# EAGLE board Mini Spectrometer Main PCB (EAGLE 9.7.0)
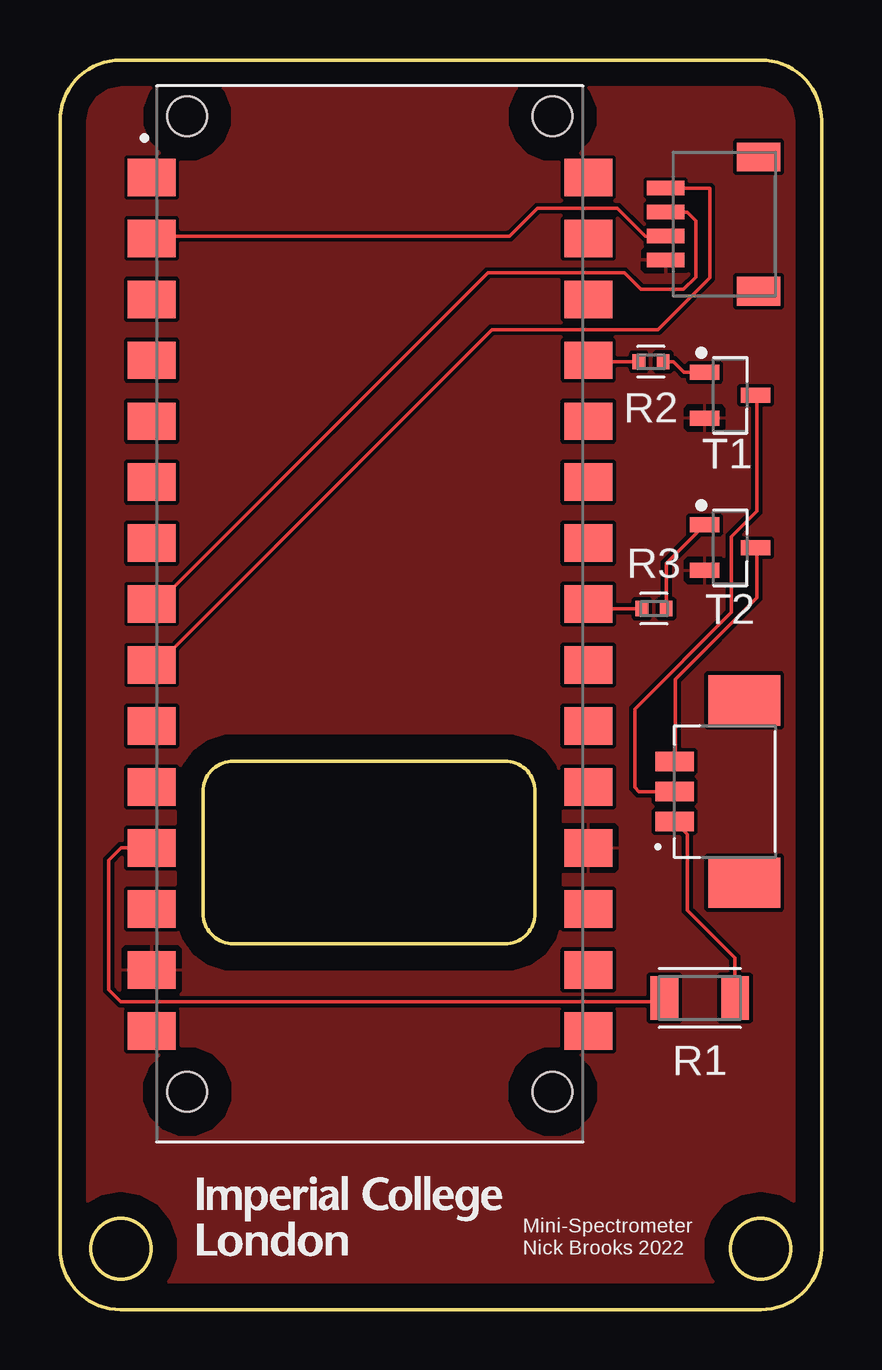
[diagram p0: board, top side]

Size 31.75 x 52.07 mm. Coordinates in mm from the lower left corner, seen from the top.
Outline: 0,2.54 arc90 2.54,0 29.21,0 arc90 31.75,2.54 31.75,49.53 arc90 29.21,52.07 2.54,52.07 arc90 0,49.53 0,2.54
Outline: 7.24,22.86 arc90 5.97,21.59 5.97,16.51 arc90 7.24,15.24 18.54,15.24 arc90 19.81,16.51 19.81,21.59 arc90 18.54,22.86 7.24,22.86
Outline: circle at 2.54,2.54 radius 1.25
Outline: circle at 29.21,2.54 radius 1.25
Copper layers (1*16): Top / Bottom
Stack-up Default Layer Stack: Top User Defined 0.035mm / Dielectric-1 User Defined 1.5mm / Bottom User Defined 0.035mm
Design rules "default": minimum track width 6mil, minimum drill 0.35mm, track to track 6mil, track to pad 6mil, pad to pad 6mil, via to via 6mil, smd to smd 6mil, copper to edge 40mil, drill to drill 6mil, minimum pad ring 10mil, minimum via ring 8mil, stop-mask expansion 4mil, vias tented up to drill 0mil, thermal gap 10mil

## Footprints (pad centres in the part's own frame; a part is rotated, then mirrored left to right if it is on the bottom)
JST_SM04B-SRSS-TB_LF__SN_ = smd 0.6 x 1.55: 1 -1.5,2.45; 2 -0.5,2.45; 3 0.5,2.45; 4 1.5,2.45 | smd 1.2 x 1.8: M -2.8,-1.425; N 2.8,-1.425
MOLEX_53261-0371 = smd 0.8 x 1.6: 1 -1.25,0; 2 0,0; 3 1.25,0 | smd 2.1 x 3: P1 -3.8,-2.9; P2 3.8,-2.9
RESC3216X70 = smd 1.165 x 1.815: 1 -1.475,0; 2 1.475,0
RESC1005X40 = smd 0.535 x 0.644: 1 -0.507,0; 2 0.507,0
SOT95P237X112-3N = smd 1.224 x 0.625: 1 -1.064,0.95; 2 -1.064,-0.95; 3 1.064,0
MODULE_ABX00027 = smd 1.56 x 2: 1 -18.19,-9.1; 2 -15.65,-9.1; 3 -13.11,-9.1; 4 -10.57,-9.1; 5 -8.03,-9.1; 6 -5.49,-9.1; 7 -2.95,-9.1; 8 -0.41,-9.1; 9 2.13,-9.1; 10 4.67,-9.1; 11 7.21,-9.1; 12 9.75,-9.1; 13 12.29,-9.1; 14 14.83,-9.1; 15 17.37,-9.1; 16 17.37,9.1; 17 14.83,9.1; 18 12.29,9.1; 19 9.75,9.1; 20 7.21,9.1; 21 4.67,9.1; 22 2.13,9.1; 23 -0.41,9.1; 24 -2.95,9.1; 25 -5.49,9.1; 26 -8.03,9.1; 27 -10.57,9.1; 28 -13.11,9.1; 29 -15.65,9.1; 30 -18.19,9.1 | hole 1.651: -20.73,-7.62; -20.73,7.62; 19.91,7.62; 19.91,-7.62

## Placement (x,y rotation side)
J1  JST-SH-4WAY-2  [JST_SM04B-SRSS-TB_LF__SN_]  27.7,45.23 90 top
P1  53261-0371  [MOLEX_53261-0371]  25.62,21.59 90 top
R1  100  [RESC3216X70]  26.67,12.99 0 top
R2  1K  [RESC1005X40]  24.64,39.5 0 top
R3  1K  [RESC1005X40]  24.77,29.21 0 top
T1  NPN  [SOT95P237X112-3N]  27.94,38.1 0 top
T2  NPN  [SOT95P237X112-3N]  27.94,31.75 0 top
U1  ABX00027  [MODULE_ABX00027]  12.92,28.99 270 top

## Library data of the parts
J1 = JST-SH-2
P1 = 53261-0371; MANUFACTURER: MOLEX
R1-R3 = Resistor; CATEGORY: Resistor; SUB-CATEGORY: Fixed
T1 T2 = Transistor; CATEGORY: Transistor; SUB-CATEGORY: BJT; TYPE: NPN
U1 = ABX00027; AVAILABILITY: Unavailable; DESCRIPTION: ATSAMD21G18A Arduino Nano 33 IoT SAM D ARM® Cortex®-M0+ MCU 32-Bit Embedded Evaluation Board; DIGIKEY-PURCHASE-URL: https://snapeda.com/shop?store=DigiKey&id=3949339; MF: Arduino; MP: ABX00027; PACKAGE: None; PRICE: None

## Nets
GND: J1.1 T1.2 T2.2 U1.14 U1.19
N$1: R1.1 U1.12
N$2: R2.1 U1.27
N$3: R3.1 U1.23
N$4: R2.2 T1.1
N$5: R3.2 T2.1
N$8: J1.2 U1.2
N$9: J1.3 U1.8
N$10: J1.4 U1.9
N$11: P1.1 R1.2
N$13: P1.2 T1.3
N$14: P1.3 T2.3
VIN: U1.15

## Tracks (layer width: path | path; a pad name or v marks a point on that pad's centre or on a via)
GND
  pour Top: -25.4,55.88 53.34,55.88 53.34,-12.7 -25.4,-12.7
N$1
  Top 0.152: 24.69,13.41 25.09,13.01 R1.1 25.2,12.83 2.54,12.83 2.03,13.34 2.03,18.72 2.55,19.24 U1.12
N$2
  Top 0.152: R2.1 22.07,39.5 22.05,39.52 U1.27
N$3
  Top 0.152: R3.1 22.02,29.21 U1.23
N$4
  Top 0.152: R2.2 25.58,39.5 26.01,39.07 26.77,39.07 T1.1
N$5
  Top 0.152: T2.1 25.27,31.1 R3.2
N$8
  Top 0.152: U1.2 4.04,44.64 4.13,44.73 18.74,44.73 19.91,45.9 23.24,45.9 24.41,44.73 J1.2
N$9
  Top 0.152: U1.8 4.04,29.4 17.84,43.2 23.53,43.2 24.22,42.51 26,42.51 26.51,43.02 26.51,45.38 26.15,45.73 J1.3
N$10
  Top 0.152: U1.9 4.04,26.86 18.01,40.83 24.94,40.83 27.1,42.99 27.1,46.73 J1.4
N$11
  Top 0.152: R1.2 28.14,13.01 28.14,14.66 26.16,16.65 26.16,19.8 P1.1
N$13
  Top 0.152: T1.3 29.06,38 29.06,33.27 27.99,32.21 27.99,29.06 23.96,25.03 23.96,21.76 24.13,21.59 P1.2
N$14
  Top 0.152: P1.3 25.65,22.87 25.65,26.26 29.06,29.67 29.06,31.75 T2.3

## Text on the board
tNames: Mini-Spectrometer / Nick Brooks 2022 | /Users/home/Desktop/Imperial Logo.bmp